# Altium PCB ArduinoPCB.PcbDoc
Units mm, origin at the board's own origin, x right, y up, seen from the top; angles counter-clockwise.
Board outline 50.8 x 25.4 mm, 2 copper layers (Top Layer, Bottom Layer); 39 components, 30 nets, 151 pads, 35 vias.
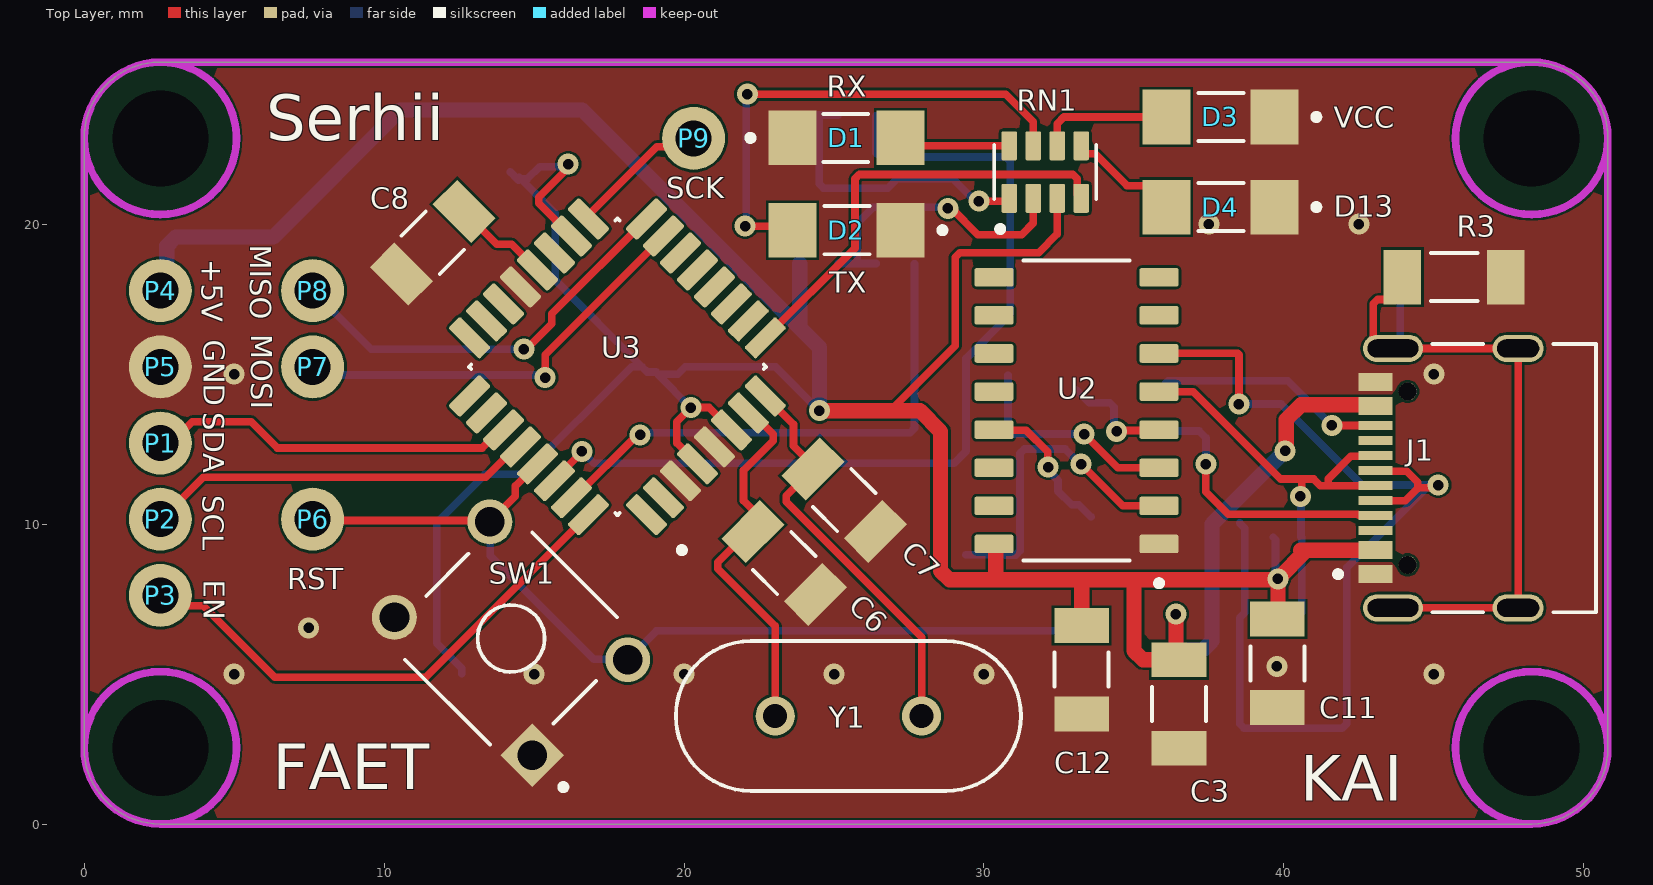
[diagram p0: Top Layer view]
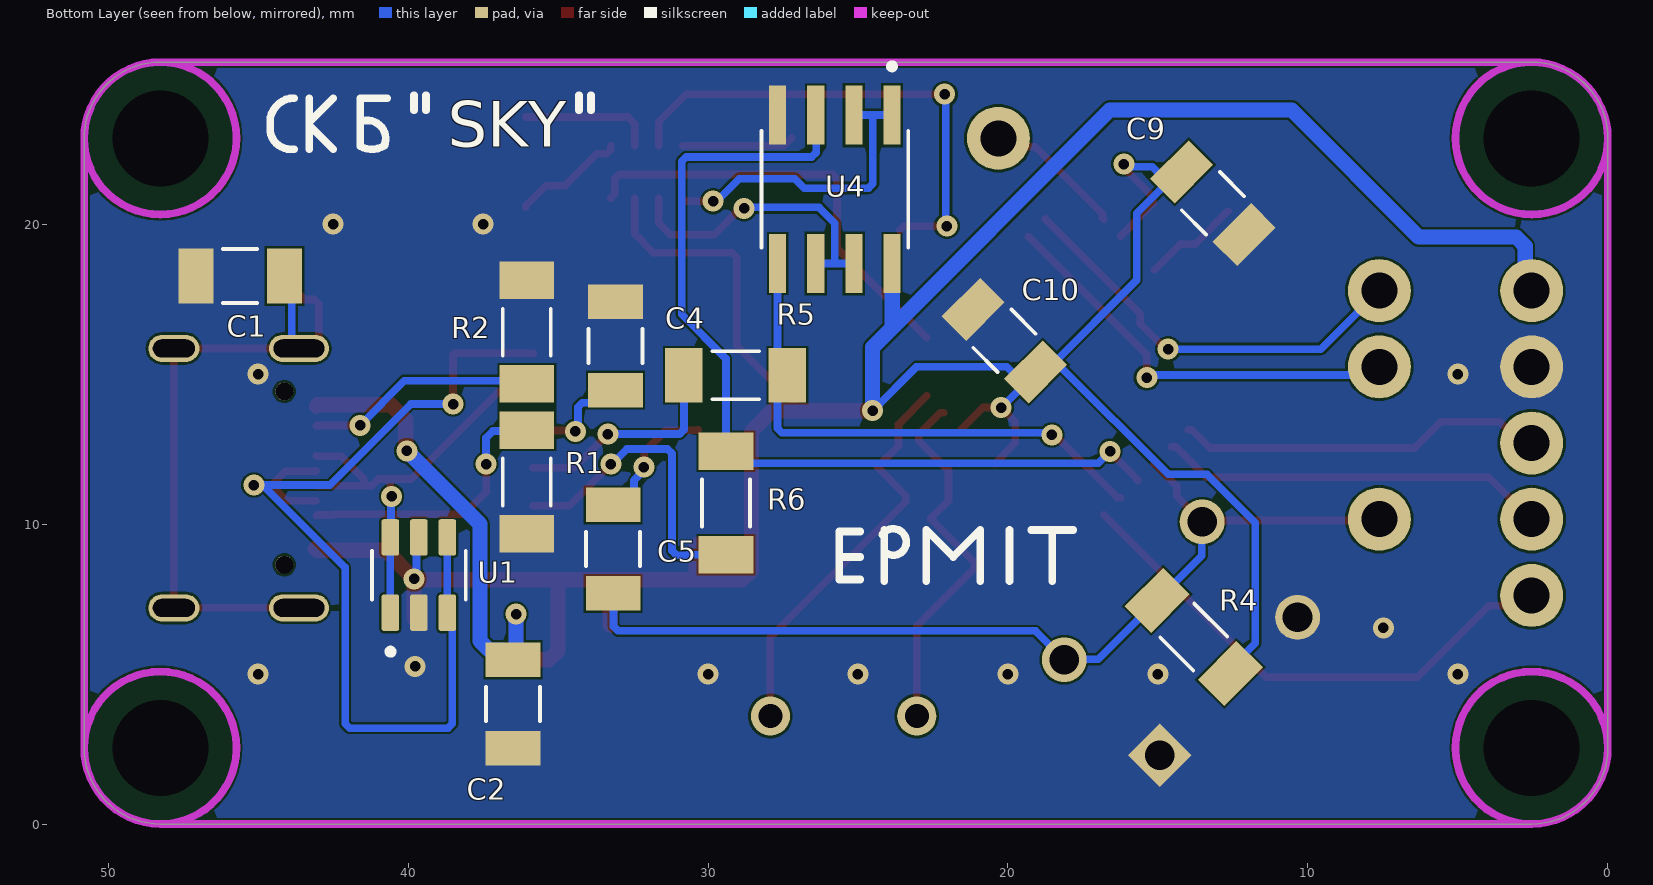
[diagram p1: Bottom Layer view, seen from below]
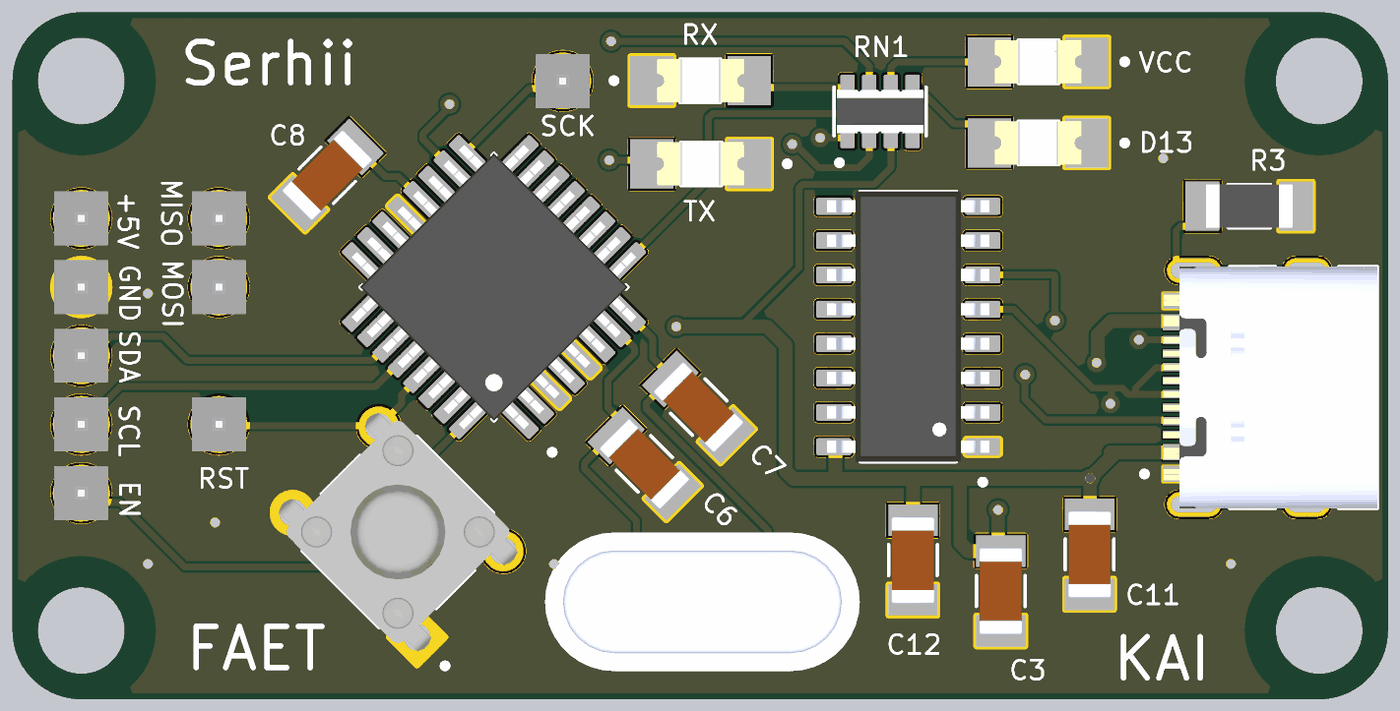
[diagram p2: 3D render of the assembled board from above, using the file's embedded part models]
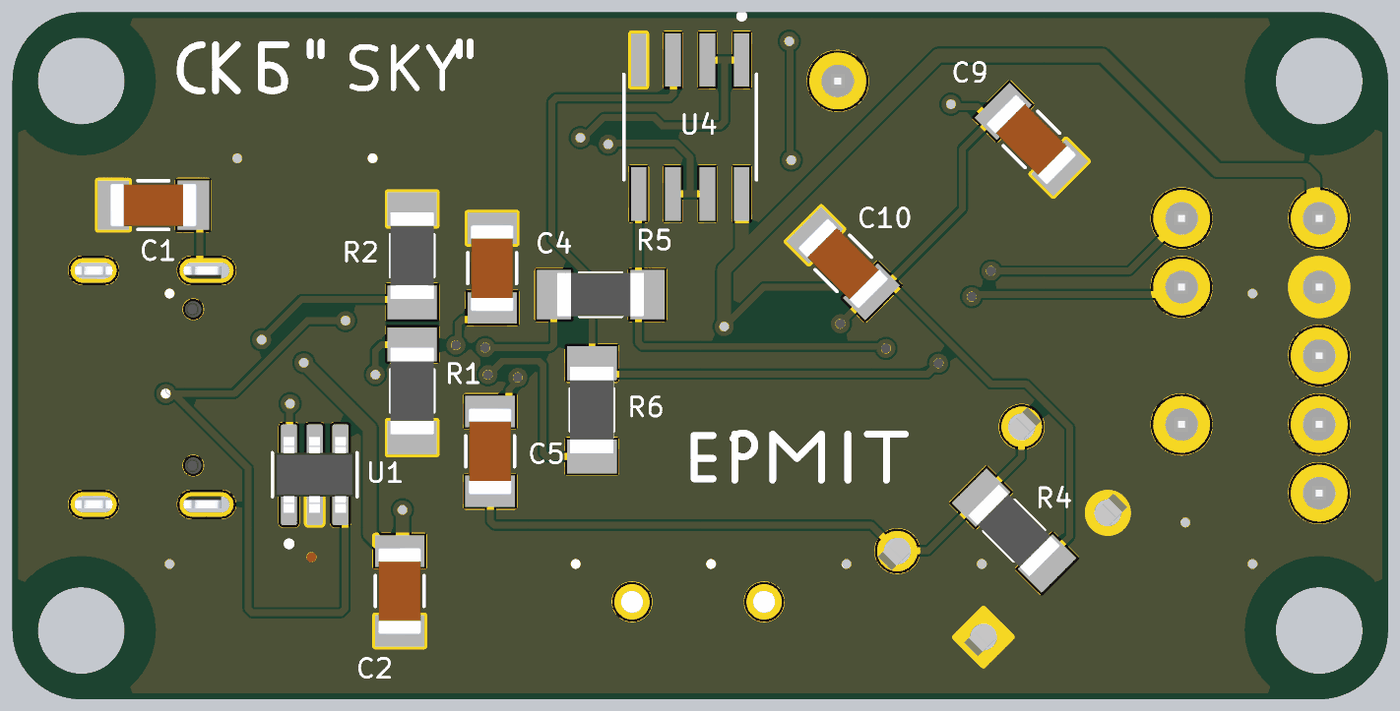
[diagram p3: 3D render of the assembled board from below, using the file's embedded part models]

## Layer stack, top to bottom
Top Solder: solder mask 0.0102, Solder Resist, Dk 3.5
Top Layer: signal copper 0.0356
Dielectric 1: dielectric 0.32, FR-4, Dk 4.8
Bottom Layer: signal copper 0.0356
Bottom Solder: solder mask 0.0102, Solder Resist, Dk 3.5

## Board outline
0,2.54 0,22.86 cw(c2.54,22.86) 2.54,25.4 48.26,25.4 cw(c48.26,22.86) 50.8,22.86 50.8,2.54 cw(c48.26,2.54) 48.26,0 2.54,0 cw(c2.54,2.54)

## Design rules (kind name [scope] priority, off if disabled: settings)
Clearance Clearance_1 [All] p1 off: gap=0.254 ignorepadtopadclearanceinfootprint=FALSE
Clearance [All] p2: gap=0.08 ignorepadtopadclearanceinfootprint=FALSE
HoleSize [All] p1: absolutevalues=TRUE maxlimit=3.5 minlimit=0.025 maxpercent=80.000 minpercent=20.000
MinimumSolderMaskSliver [All] p1: minsoldermaskwidth=0.04
PolygonConnect [All] p1: connectstyle=Direct reliefconductorwidth=0.254 reliefentries=4 polygonreliefangle="90 Angle" airgapwidth=0.254
RoutingVias [All] p1: holewidth=0.711 width=1.27 viastyle="Through Hole" minholewidth=0.711 minwidth=1.27 maxholewidth=0.711 maxwidth=1.27
SilkToSolderMaskClearance [IsPad] p1: minsilkscreentomaskgap=0.15 clearancetoexposedcopper=TRUE
SolderMaskExpansion [All] p1 off: expansion=0.102 istentingtop=FALSE
SolderMaskExpansion SolderMaskExpansion_1 [IsVia] p2: expansion=0.102 istentingtop=TRUE
SupplyNets "Schematic Supply Nets" [InNet('IndicatePin')] p1: voltage=0.000
SupplyNets "Schematic Supply Nets_10" [InNet('FD2')] p2: voltage=0.000
SupplyNets "Schematic Supply Nets_9" [InNet('FD1')] p3: voltage=0.000
SupplyNets "Schematic Supply Nets_7" [InNet('TX')] p4: voltage=0.000
SupplyNets "Schematic Supply Nets_6" [InNet('VCC')] p5: voltage=0.000
SupplyNets "Schematic Supply Nets_5" [InNet('RX')] p6: voltage=0.000
SupplyNets "Schematic Supply Nets_4" [InNet('D+')] p7: voltage=0.000
SupplyNets "Schematic Supply Nets_3" [InNet('GND')] p8: voltage=0.000
SupplyNets "Schematic Supply Nets_2" [InNet('D-')] p9: voltage=0.000
SupplyNets "Schematic Supply Nets_1" [InNet('Reset')] p10: voltage=0.000
Width [All] p1: maxlimit=0.508 minlimit=0.254 preferedwidth=0.254 minimp=50.000000 maximp=50.000000 favimp=50.000000
27 further rules are at their usual default settings.

## Components (designator, comment, footprint, x,y, rotation, side; value= is the part's Value field where it differs from the comment)
C1 "1n" "Capacitor 1206" 45.598,18.27 r0 bottom
C2 "100n" "Capacitor 1206" 36.5,4 r90 bottom
C3 "10u" "Capacitor 1206" 36.5,4 r90 top
C4 "100n" "Capacitor 1206" 33.085,15.938 r90 bottom
C5 "100n" "Capacitor 1206" 33.163,9.165 r270 bottom
C6 "22p" "Capacitor 1206" 23.34,8.7 r315 top
C7 "22p" "Capacitor 1206" 25.34,10.8 r315 top
C8 "100n" "Capacitor 1206" 11.623,19.378 r225 top
C9 "100n" "Capacitor 1206" 13.169,20.695 r225 bottom
C10 "100n" "Capacitor 1206" 20.119,16.112 r45 bottom
C11 "100n" "Capacitor 1206" 39.781,5.354 r270 top
C12 "100n" "Capacitor 1206" 33.255,5.143 r270 top
D1 "RX" "LED 1206" 25.414,22.872 r0 top
D2 "TX" "LED 1206" 25.414,19.796 r180 top
D3 "VCC" "LED 1206" 37.878,23.57 r180 top
D4 "D13" "LED 1206" 37.878,20.567 r180 top
J1 "TYPE-C-31-M-12" HRO_TYPE-C-31-M-12 47.806,11.528 r90 top
P1 "SDA" PCB_Pin_1 2.54,12.7 r0 top
P2 "SCL" PCB_Pin_1 2.54,10.16 r0 top
P3 "EN_PIN" PCB_Pin_1 2.54,7.62 r0 top
P4 "VCC" PCB_Pin_1 2.54,17.78 r0 top
P5 "GND" PCB_Pin_1 2.54,15.24 r0 top
P6 "RST" PCB_Pin_1 7.62,10.16 r0 top
P7 "MOSI" PCB_Pin_1 7.62,15.24 r0 top
P8 "MISO" PCB_Pin_1 7.62,17.78 r0 top
P9 "SCK" PCB_Pin_1 20.32,22.86 r0 top
R1 "5.1K" "Resistor 1206" 36.04,11.4 r90 bottom
R2 "5.1K" "Resistor 1206" 36.04,16.4 r90 bottom
R3 "1M" "Resistor 1206" 45.677,18.232 r180 top
R4 "10K" "Resistor 1206" 13.807,6.237 r45 bottom
R5 "100" "Resistor 1206" 29.077,14.96 r0 bottom
R6 "100" "Resistor 1206" 29.4,10.7 r270 bottom
RN1 "Resistor array 1206" "Resistor array 1206" 32.042,21.734 r90 top
SW1 "Button" Button 14.235,6.184 r135 top
U1 "USBLC6-2SC6" USBLC6-2SC6 39.64,8.3 r90 bottom
U2 "CH340C" CH-340C 33.085,13.781 r180 top
U3 "ATMEGA328P-AU" ATMEGA328P-AU 17.78,15.24 r135 top
U4 "LM358DT" LM358DT 25.772,21.159 r270 bottom
Y1 "Crystal 16MHz" "Crystal 16MHz" 25.48,3.6 r180 top

## Footprints (in the part's own frame and the unit in brackets; to place one, negate y for a bottom-side part, rotate by r counter-clockwise, add the part's x,y. Pads: shape width x height; smd on the part's side, far side on the other; paste and mask are expansions set on the pad)
ATMEGA328P-AU [mm]
  rrect25% 1.47x0.55 smd paste+0 mask+0.102: 1(-4.17,2.8) 2(-4.17,2) 3(-4.17,1.2) 4(-4.17,0.4) 5(-4.17,-0.4) 6(-4.17,-1.2) 7(-4.17,-2) 8(-4.17,-2.8) 17(4.17,-2.8) 18(4.17,-2) 19(4.17,-1.2) 20(4.17,-0.4) 21(4.17,0.4) 22(4.17,1.2) 23(4.17,2) 24(4.17,2.8)
  rrect25% 0.55x1.47 smd paste+0 mask+0.102: 9(-2.8,-4.17) 10(-2,-4.17) 11(-1.2,-4.17) 12(-0.4,-4.17) 13(0.4,-4.17) 14(1.2,-4.17) 15(2,-4.17) 16(2.8,-4.17) 25(2.8,4.17) 26(2,4.17) 27(1.2,4.17) 28(0.4,4.17) 29(-0.4,4.17) 30(-1.2,4.17) 31(-2,4.17) 32(-2.8,4.17)
  silkscreen extent -5.94,-3.5 3.5,3.5, body extent -4.5,-4.5 4.5,4.5, height 1.2
Button [mm]
  rect 1.498x1.498 / inner round 1.498 / far side rect 1.498x1.498 hole 0.99 mask+0.102: 1(-3.25,2.25)
  round 1.498 hole 0.99 mask+0.102: 2(3.25,2.25) 3(-3.25,-2.25) 4(3.25,-2.25)
  silkscreen extent -4.83,-3 3,3, body extent -3.9,-3 3.9,3, height 10.16
"Capacitor 1206" [mm]
  rect 1.16x1.82 smd: 1(-1.475,0) 2(1.475,0)
  silkscreen extent -0.57,-0.9 0.57,0.9, body extent -1.6,-0.8 1.6,0.8, height 1.78
CH-340C [mm]
  rrect25% 1.31x0.62 smd: 1(-2.75,4.445) 2(-2.75,3.175) 3(-2.75,1.905) 4(-2.75,0.635) 5(-2.75,-0.635) 6(-2.75,-1.905) 7(-2.75,-3.175) 8(-2.75,-4.445) 9(2.75,-4.445) 10(2.75,-3.175) 11(2.75,-1.905) 12(2.75,-0.635) 13(2.75,0.635) 14(2.75,1.905) 15(2.75,3.175) 16(2.75,4.445)
  silkscreen extent -2.85,-5 1.78,5.85, body extent -3,-5 3,5, height 1.8
"Crystal 16MHz" [mm]
  round 1.308 hole 0.8 mask+0.102: 1(-2.44,0) 2(2.44,0)
  silkscreen extent -5.75,-2.5 5.75,2.5, body extent -5.75,-2.5 5.75,2.5, height 3.7
HRO_TYPE-C-31-M-12 [mm]
  rect 0.6x1.14 smd mask+0.05: A1_B12(-3.2,4.75) A4_B9(-2.4,4.75) B1_A12(3.2,4.75) B4_A9(2.4,4.75)
  rect 0.3x1.14 smd mask+0.05: A5(-1.25,4.75) A6(-0.25,4.75) A7(0.25,4.75) A8(1.25,4.75) B5(1.75,4.75) B6(0.75,4.75) B7(-0.75,4.75) B8(-1.75,4.75)
  oval 0.9x2 hole 0.6 slot 1.7 at 90 deg: S1(-4.325,4.17) S2(4.325,4.17)
  oval 0.9x1.7 hole 0.6 slot 1.4 at 90 deg: S3(-4.325,0) S4(4.325,0)
  round 0.6 hole 0.6 unplated: ""(-2.89,3.68) ""(2.89,3.68)
  silkscreen extent -4.47,-2.6 4.47,6.1, body extent -4.47,-2.6 4.47,5.31, height 3.31
"LED 1206" [mm]
  rect 1.6x1.82 smd: A(1.8,0) C(-1.8,0)
  silkscreen extent -3.3,-0.8 0.73,0.8, body extent -1.6,-0.8 1.6,0.8, height 1.12
LM358DT [mm]
  rect 1.97x0.57 smd: 1(-2.475,1.905) 2(-2.475,0.635) 3(-2.475,-0.635) 4(-2.475,-1.905) 5(2.475,-1.905) 6(2.475,-0.635) 7(2.475,0.635) 8(2.475,1.905)
  silkscreen extent -4.2,-2.45 1.95,2.45
PCB_Pin_1 [mm]
  round 2.1 hole 1.2: 0(0,0)
  body extent -1,-1 1,1, height 4.55
"Resistor 1206" [mm]
  rect 1.25x1.82 smd: 1(-1.725,0) 2(1.725,0)
  silkscreen extent -0.78,-0.8 0.78,0.8, body extent -1.6,-0.8 1.6,0.8, height 0.6
"Resistor array 1206" [mm]
  rrect25% 0.97x0.53 smd: 1(-0.875,1.2) 2(-0.875,0.4) 3(-0.875,-0.4) 4(-0.875,-1.2) 5(0.875,-1.2) 6(0.875,-0.4) 7(0.875,0.4) 8(0.875,1.2)
  silkscreen extent -2,-1.7 0.9,1.7, body extent -0.8,-1.6 0.8,1.6, height 0.6
USBLC6-2SC6 [mm]
  rrect25% 1.21x0.59 smd: 1(-1.255,0.95) 2(-1.255,0) 3(-1.255,-0.95) 4(1.255,-0.95) 5(1.255,0) 6(1.255,0.95)
  silkscreen extent -2.65,-1.57 0.81,1.57, body extent -1.4,-1.46 1.4,1.46, height 1.42

## Part data
C1 C2 C3 C4 C5 C6 C7 C8 C9 C10 C11 C12: library part "Capacitor 1206", Package="3216 AVX", Check_prices=https://www.snapeda.com/parts/12061C225K4T2A/AVX/view-part/?ref=eda, MF=AVX, MP=12061C225K4T2A, SnapEDA_Link=https://www.snapeda.com/parts/12061C225K4T2A/AVX/view-part/?ref=snap
D1 D2 D3 D4: library part "LED 1206", Package="1206 Lite-On", Check_prices=https://www.snapeda.com/parts/LTST-C230KGKT/Lite-On/view-part/?ref=eda, MF="Lite-On Inc.", MP=LTST-C230KGKT, SnapEDA_Link=https://www.snapeda.com/parts/LTST-C230KGKT/Lite-On/view-part/?ref=snap
J1: "USB Connectors 24 Receptacle 1 8.94*7.3mm RoHS", Package=Package, Check_prices=https://www.snapeda.com/parts/TYPE-C-31-M-12/HRO+Electronics+Co.%252C+Ltd./view-part/?ref=eda, MF="HRO Electronics Co., Ltd.", MP=TYPE-C-31-M-12, SnapEDA_Link=https://www.snapeda.com/parts/TYPE-C-31-M-12/HRO+Electronics+Co.%252C+Ltd./view-part/?ref=snap
P1 P2 P3 P4 P5 P6 P7 P8 P9: library part PIN_1
R1 R2 R3 R4 R5 R6: library part "Resistor 1206", Package=None, Availability=Unavailable, MP=ERJU08F4703V, Price=None
RN1: "Resistor,Thick Film,Networks & Arrays,330 Ohm,5%,8 Pin", Package="NON STANDARD-8 Bourns", Check_prices=https://www.snapeda.com/parts/CAY16-331J4LF/Bourns/view-part/?ref=eda, MF=Bourns, MP=CAY16-331J4LF, SnapEDA_Link=https://www.snapeda.com/parts/CAY16-331J4LF/Bourns/view-part/?ref=snap
SW1: "Tactile Switch SPST-NO Top Actuated Through Hole", Package=None, Check_prices=https://www.snapeda.com/parts/1-1825910-4/TE+Connectivity+Alcoswitch+Switches/view-part/?ref=eda, MF="TE Connectivity ALCOSWITCH Switches", MP=1-1825910-4, SnapEDA_Link=https://www.snapeda.com/parts/1-1825910-4/TE+Connectivity+Alcoswitch+Switches/view-part/?ref=snap
U1: "17V Clamp 5A (8/20Âµs) Ipp Tvs Diode Surface Mount SOT-23-6", Package="SOT-23-6 STMicroelectronics", Availability="In Stock", Check_prices=https://www.snapeda.com/parts/USBLC6-2SC6/STMicroelectronics/view-part/?ref=eda, MF=STMicroelectronics, MP=USBLC6-2SC6, Price=None, Purchase-URL=https://pricing.snapeda.com/search/part/USBLC6-2SC6/?ref=eda, SnapEDA_Link=https://www.snapeda.com/parts/USBLC6-2SC6/STMicroelectronics/view-part/?ref=snap
U2: "USB to serial chip CH340", Package=None, Availability="Not in stock", Check_prices=https://www.snapeda.com/parts/CH340C/WCH/view-part/?ref=eda, MF=WCH, MP=CH340C, Price=None, SnapEDA_Link=https://www.snapeda.com/parts/CH340C/WCH/view-part/?ref=snap
U3: "MICROCONTROLLER MCU, 8 BIT, ATMEGA, 20MH; MICROCONTROLLER MCU, 8 BIT, ATMEGA, 20MHZ, TQFP-32; Controller Family/Series:ATmega; CPU Speed:20MHz; Program Memory Size:32KB; RAM Memory Size:2KB; No. of Pins:32Pins; MCU Case Style:TQFP; No. of I/O's:23I/O's; P", Package=None, Check_prices=https://www.snapeda.com/parts/ATMEGA328PAU/Microchip+Technology/view-part/?ref=eda, MF="Microchip Technology", MP=ATMEGA328PAU, SnapEDA_Link=https://www.snapeda.com/parts/ATMEGA328PAU/Microchip+Technology/view-part/?ref=snap
U4: Package="SOIC-8 STMicroelectronics", Availability=Unavailable, MF=STMicroelectronics, MP=LM358DT, Price=None, SnapEDA_Link=https://www.snapeda.com/parts/LM358DT/STMicroelectronics/view-part/6634/?ref=snap
Y1: "Quartz Crystal, HC-49/U-S Short Package", Package=None, Check_prices=https://www.snapeda.com/parts/CA-3.6864-18-3050-X/Aker/view-part/?ref=eda, MF="Aker Technology", MP=CA-3.6864-18-3050-X, SnapEDA_Link=https://www.snapeda.com/parts/CA-3.6864-18-3050-X/Aker/view-part/?ref=snap

## Free pads (board coordinates)
  round 0 hole 3.2 unplated: 1(2.54,22.86) 2(48.26,22.86) 3(2.54,2.54) 4(48.26,2.54)

## Via types
v1: diameter 0.7, hole 0.35, Top Layer to Bottom Layer, tented both sides, 35 vias

## Nets (pads, with @x,y where several pads share a name; then routed paths per layer and width w, separated by ;. In a path a pad name is that pad's centre, name@x,y a point inside that pad or via, vN(x,y) a via of type N, cw(c..) or ccw(c..) an arc to the next point about the centre after c; other vN are vias at no path point)
D+: J1.A6 J1.B6 U1.1 U1.6 U2.5 | length 15.1
  Top Layer w0.254: U2.5 36.975,14.416 39.892,11.5 40.591,11.5 ; v1(40.549,10.926) 40.591,10.968 40.591,11.5 ; 41.476,11.271 J1.A6@43.049,11.271 ; 41.476,11.275 41.216,11.275 40.991,11.5 40.591,11.5 ; 41.476,11.301 41.476,11.502 42.229,12.255 43.033,12.255 J1.B6
  Bottom Layer w0.254: v1(40.549,10.926) 40.569,10.905 40.569,9.576 U1.6 U1.1
D-: J1.A7 J1.B7 U1.3 U1.4 U2.6 | length 35.9
  Top Layer w0.254: U2.6 35.842,15.693 38.451,15.693 38.5,15.644 v1(38.5,14) ; J1.B7 44.049,10.778 44.457,11.186 ; J1.A7 43.079,11.755 44.099,11.755 44.457,11.397 44.457,11.186 ; v1(45.14,11.3) 45.055,11.215 44.485,11.215 44.457,11.186
  Bottom Layer w0.254: v1@38.415,13.915 v1(38.5,14) 39.912,14 42.612,11.3 v1@44.849,11.3 ; U1.4@38.522,10.033 38.69,9.865 U1.3 38.522,6.877 38.522,6.419 ; v1(45.14,11.3) v1@44.849,11.3 ; 38.521,6.418 38.521,3.344 38.67,3.196 41.95,3.196 42.098,3.344 42.098,8.55 v1@44.849,11.3 ; 38.521,6.418 38.522,6.419
FD1: RN1.1 U4.1 U4.2 | length 10.4
  Top Layer w0.254: v1(29.828,20.761) 30.744,20.761 RN1.1
  Bottom Layer w0.254: U4.1 24.502,23.634 ; U4.2 24.502,23.634 ; v1(29.828,20.761) 29.712,20.761 28.96,21.514 27.103,21.514 26.788,21.199 24.651,21.199 24.502,21.348 24.502,23.634
FD2: RN1.2 U4.6 U4.7 | length 10.1
  Top Layer w0.254: v1(28.799,20.521) 28.917,20.521 29.79,19.649 31.255,19.649 31.642,20.036 RN1.2
  Bottom Layer w0.254: U4.7 25.772,18.684 ; U4.6 25.772,18.684 ; v1(28.799,20.521) 28.759,20.562 26.302,20.562 25.772,20.032 25.772,18.684
GND: C1.2 C2.1 C3.1 C4.2 C6.2 C7.2 C8.2 C9.2 C10.2 C11.2 C12.2 D1.C D2.C D3.C D4.C J1.A1_B12 J1.B1_A12 P5.0 R1.1 R2.2 R3.1 SW1.1 SW1.2 U1.2 U2.1 U3.3 U3.5 U3.21 U4.4
  other v1: 5,5 15,5 20,5 25,5 30,5 45,5 39.76,5.254 7.484,6.536 5,15 45,15 37.5,20 42.5,20
IndicatePin: RN1.4 U3.9 | length 14.8
  Top Layer w0.254: U3.9 25.7,19.2 25.7,21.505 25.849,21.654 32.955,21.654 33.104,21.505 33.104,20.997 RN1.4
NetC1_1: C1.1 J1.S1 J1.S2 J1.S3 J1.S4 R3.2 | length 23.1
  Top Layer w0.254: J1.S1 J1.S3 J1.S4 J1.S2 43.28,15.853 42.981,16.151 42.981,17.338 43.13,17.487 43.454,17.487 43.952,17.985 R3.2
  Bottom Layer w0.254: J1.S2 43.883,16.101 43.883,18.031 C1.1
NetC4_1: C4.1 U2.4 | length 3.8
  Top Layer w0.254: v1(34.421,13.092) 34.448,13.119 35.808,13.119 U2.4
  Bottom Layer w0.254: C4.1 33.504,14.044 34.187,14.044 34.336,13.896 34.336,13.177 v1(34.421,13.092)
NetC5_1: C5.1 U2.13 | length 5
  Top Layer w0.254: U2.13 30.357,13.124 31.4,13.124 32.12,12.405 32.12,11.92 v1(32.14,11.9)
  Bottom Layer w0.254: v1(32.14,11.9) 32.14,11.779 32.467,11.452 32.467,11.093 32.92,10.64 C5.1 ; C5.1@33.165,10.642 C5.1@33.567,10.241
NetC6_1: C6.1 U3.7 Y1.2 | length 12.5
  Top Layer w0.254: U3.7 22.254,13.706 22.97,12.99 22.97,12.779 21.985,11.794 21.985,10.779 C6.1@22.584,10.18 ; C6.1@22.497,10.143 22.497,10.093 21.127,8.723 21.127,8.513 23.04,6.6 Y1.2
NetC7_1: C7.1 U3.8 Y1.1 | length 13.6
  Top Layer w0.254: U3.8 23.648,13.332 23.648,12.613 24.358,11.904 23.402,10.948 23.402,10.738 27.92,6.22 Y1.1
NetC8_1: C8.1 U3.20 | length 3.3
  Top Layer w0.254: C8.1 13.756,19.332 14.253,19.332 U3.20
NetD1_A: D1.A RN1.8 | length 3.7
  Top Layer w0.254: D1.A 27.477,22.609 RN1.8
NetD2_A: D2.A RN1.7 | length 16.8
  Top Layer w0.254: v1(22.038,19.934) 23.476,19.934 D2.A ; v1(22.11,24.328) 30.721,24.328 31.642,23.407 RN1.7
  Bottom Layer w0.254: v1(22.038,19.934) 22.074,19.969 22.074,24.292 v1(22.11,24.328)
NetD3_A: D3.A RN1.6 | length 4.5
  Top Layer w0.254: RN1.6 32.442,23.346 32.666,23.57 D3.A
NetD4_A: D4.A RN1.5 | length 3.8
  Top Layer w0.254: RN1.5 33.242,22.476 33.38,22.338 33.713,22.338 34.77,21.281 35.405,21.281 36.078,20.608 D4.A
NetJ1_A5: J1.A5 R1.2 | length 9.3
  Top Layer w0.254: v1(37.4,12) 37.399,11.077 38.149,10.327 42.467,10.327 42.492,10.301 43.033,10.301 J1.A5
  Bottom Layer w0.254: R1.2 36.065,13.1 37.182,13.1 37.4,12.883 v1(37.4,12)
NetJ1_B5: J1.B5 R2.1 | length 7.7
  Top Layer w0.254: v1(41.6,13.29) 41.606,13.284 43.05,13.284 J1.B5
  Bottom Layer w0.254: R2.1 36.142,14.777 40.123,14.777 41.6,13.3 v1(41.6,13.29)
NetP1_0: P1.0 U3.27 | length 12.3
  Top Layer w0.254: P1.0 2.901,12.7 3.612,13.411 5.569,13.411 6.444,12.536 13.275,12.536 13.879,13.14 U3.27
NetP2_0: P2.0 U3.28 | length 13
  Top Layer w0.254: P2.0 2.578,10.16 3.974,11.556 13.389,11.556 14.407,12.574 U3.28
NetP3_0: P3.0 U3.32 | length 17.6
  Top Layer w0.254: P3.0 2.886,7.274 3.971,7.274 6.354,4.891 11.389,4.891 U3.32@16.81,10.311
NetP7_0: P7.0 U3.15 | length 14.2
  Top Layer w0.254: v1(15.373,14.883) 15.373,15.636 U3.15@19.314,19.578
  Bottom Layer w0.254: P7.0 7.892,14.968 15.288,14.968 v1(15.373,14.883)
NetP8_0: P8.0 U3.16 | length 13.9
  Top Layer w0.254: v1(14.659,15.832) 14.739,15.832 15.585,16.679 15.585,17.005 U3.16
  Bottom Layer w0.254: P8.0 9.568,15.832 v1(14.659,15.832)
NetP9_0: P9.0 U3.17 | length 4.7
  Top Layer w0.254: U3.17 16.85,20.208 16.85,20.339 19.088,22.576 20.036,22.576 P9.0
NetR5_2: R5.2 U2.3 | length 7.4
  Top Layer w0.254: v1(33.34,13) 34.464,11.876 U2.3
  Bottom Layer w0.254: R5.2 30.802,13.149 30.951,13 v1(33.34,13)
NetR6_2: R6.2 U2.2 | length 10.6
  Top Layer w0.254: v1(33.24,12) 34.634,10.606 U2.2
  Bottom Layer w0.254: R6.2 30.691,8.975 30.707,8.959 31.051,8.959 31.2,9.108 31.2,12.351 31.349,12.5 32.706,12.5 33.206,12 v1(33.24,12)
Reset: C5.2 P6.0 R4.2 SW1.3 SW1.4 U3.29 | length 32.3
  Top Layer w0.254: P6.0 7.664,10.116 13.484,10.116 SW1.4 ; SW1.4@13.528,10.083 14.372,10.928 14.372,11.266 U3.29
  Bottom Layer w0.254: SW1.4 13.541,10.059 13.541,8.943 R4.2 16.994,5.49 18.11,5.49 SW1.3 19.084,6.437 33.001,6.437 33.149,6.586 C5.2@33.149,7.677
RX: R5.1 U3.31 U4.5 | length 17.9
  Top Layer w0.254: U3.31 16.347,10.877 18.439,12.969 v1(18.541,12.969)
  Bottom Layer w0.254: v1(18.541,12.969) 18.617,13.045 27.535,13.045 27.684,13.194 U4.5@27.684,18.678
TX: R6.1 U3.30 U4.3 | length 30.6
  Top Layer w0.254: U3.30 15.68,11.474 16.598,12.392 v1(16.598,12.424)
  Bottom Layer w0.254: v1(16.598,12.424) 16.995,12.026 29.001,12.026 R6.1 29.4,15.517 30.88,16.997 30.88,22.088 30.731,22.237 26.538,22.237 26.389,22.386 U4.3@26.389,23.617
VCC: C2.2 C3.2 C9.1 C10.1 C11.1 C12.1 J1.A4_B9 J1.B4_A9 P4.0 R4.1 RN1.3 U1.5 U2.16 U3.4 U3.6 U3.18 U4.8 | length 133
  Top Layer w0.254: v1(16.14,22) 16.14,21.879 15.16,20.899 15.16,20.689 U3.18 ; U3.4 19.752,12.702 19.752,13.409 v1(20.226,13.883) 20.834,13.883 U3.6 ; 26.88,13.778 29.04,15.938 29.04,18.894 29.189,19.042 31.82,19.042 32.448,19.67 32.448,20.853 RN1.3 ; C11.1 C11.1@39.8,6.848
  Top Layer w0.508: v1(24.516,13.778) 26.88,13.778 27.864,13.778 28.554,13.088 28.554,8.44 28.852,8.142 33.255,8.142 ; U2.16 30.392,9.28 30.392,8.452 ; C12.1 33.255,8.142 ; v1(36.4,7) 36.4,5.575 C3.2 35.298,5.475 35,5.773 35,8.142 ; v1@39.572,8.142 35,8.142 ; v1@39.772,8.142 v1(39.8,8.17) ; C11.1@39.8,6.848 v1(39.8,8.17) ; v1(40.04,12.441) 40.077,12.478 40.077,13.482 40.568,13.974 43.01,13.974 J1.B4_A9 ; 40.558,9.128 J1.A4_B9 J1.A4_B9@43.102,9.174 ; 40.758,9.128 v1(39.8,8.17) ; 33.255,8.142 35,8.142
  Bottom Layer w0.254: R4.1 12.588,5.185 11.752,6.02 11.752,10.042 13.367,11.657 14.663,11.657 18.255,15.249 C10.1@18.598,15.249 ; C9.1 C9.1@14.481,21.469 ; C9.1@14.446,21.505 14.774,21.505 15.184,21.915 16.055,21.915 v1(16.14,22) ; C9.1@14.503,21.562 15.711,20.354 15.711,18.136 C10.1@18.598,15.249 ; C10.1 18.778,15.069 C10.1@18.598,15.249 ; C10.1@19.136,14.973 v1(20.226,13.883) ; C10.1@19.154,14.991 19.794,14.991 20.048,15.245 23.049,15.245 v1(24.516,13.778) ; U1.5 39.72,9.475 39.72,8.25 v1(39.8,8.17)
  Bottom Layer w0.508: P4.0 2.757,17.997 2.757,19.271 3.055,19.569 6.309,19.569 10.54,23.8 16.606,23.8 24.516,15.89 ; 23.859,16.619 U4.8@23.859,18.676 ; v1(24.516,13.778) 24.516,15.84 ; v1(36.4,7) 36.4,5.575 C2.2 36.826,5.801 37.303,5.801 37.601,6.099 37.601,10.002 v1(40.04,12.441)
pads on no net: J1. J1.A8 J1.B8 U2.7 U2.8 U2.9 U2.10 U2.11 U2.12 U2.14 U2.15 U3.1 U3.2 U3.10 U3.11 U3.12 U3.13 U3.14 U3.19 U3.22 U3.23 U3.24 U3.25 U3.26

## Polygon pours and split planes (outlines as drawn)
GND on Top Layer "NONET_L-01_P-001" (solid, remove dead copper, pour order 0): 0,0 0,25.4 50.8,25.4 50.8,0
GND on Bottom Layer "NONET_L-01_P-001" (solid, remove dead copper, pour order 1): 0,0 0,25.4 50.8,25.4 50.8,0

## Keep-outs
Keep-Out Layer:
  lines w0.254: 0,2.54 ccw(c2.54,2.54) 2.54,0 ; 0,2.54 cw(c2.54,2.54) 2.54,5.08 cw(c2.54,2.54) 5.08,2.54 cw(c2.54,2.54) 2.54,0 ; 0,2.54 0,22.86 ; 0,22.86 ccw(c2.54,22.86) 2.54,20.32 ccw(c2.54,22.86) 5.08,22.86 ccw(c2.54,22.86) 2.54,25.4 ; 0,22.86 cw(c2.54,22.86) 2.54,25.4 ; 2.54,0 48.26,0 ; 2.54,25.4 48.26,25.4 ; 48.26,0 ccw(c48.26,2.54) 50.8,2.54 ; 48.26,0 cw(c48.26,2.54) 45.72,2.54 cw(c48.26,2.54) 48.26,5.08 cw(c48.26,2.54) 50.8,2.54 ; 48.26,25.4 cw(c48.26,22.86) 50.8,22.86 ; 48.26,25.4 ccw(c48.26,22.86) 45.72,22.86 ccw(c48.26,22.86) 48.26,20.32 ccw(c48.26,22.86) 50.8,22.86 ; 50.8,2.54 50.8,22.86

## Silkscreen, mask and mechanical layers (free items; w line width, h text height)
Top Overlay:
  text "Serhii" at 6.077,22.788 h1.52
  text "SCK" at 19.408,20.859 h0.7
  text "MISO" at 5.532,19.312 h0.7 r270
  text "+5V" at 3.923,18.832 h0.7 r270
  text "MOSI" at 5.572,16.327 h0.7 r270
  text "GND" at 3.987,16.148 h0.7 r270
  text "SDA" at 3.974,13.721 h0.7 r270
  text "SCL" at 3.961,10.961 h0.7 r270
  text "EN" at 3.987,8.136 h0.7 r270
  text "RST" at 6.772,7.831 h0.7
  text "FAET" at 6.289,1.159 h1.52
  text "KAI" at 40.539,0.779 h1.52
Bottom Overlay:
  lines w0.254: 17.827,9.802 18.527,9.802 ; 18.527,8.102 18.527,9.802 ; 19.227,9.802 18.527,9.802 ; 19.949,8.102 19.949,9.802 ; 20.927,8.102 20.927,9.802 ; 22.727,8.102 22.727,9.802 21.827,8.902 20.927,9.802 ; 24.127,8.102 24.127,9.802 ; 24.127,9.08 cw(c23.827,9.402) 24.193,9.646 ; 24.927,8.152 25.627,8.152 25.627,9.752 24.927,9.752 ; 24.927,8.902 25.627,8.902 ; 33.9,23.8 33.9,24.3 ; 34.3,23.8 34.3,24.3 ; 39.4,23.8 39.4,24.3 ; 39.8,23.8 39.8,24.3 ; 40.7,24.2 41.6,24.2 41.6,22.6 cw(c41.208,23.253) 40.786,22.619 ; 40.77,22.681 cw(c41.35,22.85) 41.6,23.4 ; 42.5,22.5 43.3,23.3 43.3,23.375 ; 42.5,24.2 43.3,23.4 43.3,23.35 ; 43.3,22.5 43.3,24.2 ; 43.8,22.5 ccw(c43.9,23.2) 44.6,23.1 44.6,23.4 ccw(c43.8,23.4) 43.8,24.2 ; 20.927,9.802 20.927,9.802
  text "SKY" at 38.68,22.579 h1.52
Mechanical 1:
  the board outline again, w0.254